# Altium PCB PCB.PcbDoc (part 2 of 2)
Units mm, origin at the board's own origin, x right, y up, seen from the top; angles counter-clockwise.
Board outline 200 x 150 mm, 2 copper layers (Top Layer, Bottom Layer); 72 components, 46 nets, 281 pads, 35 vias.
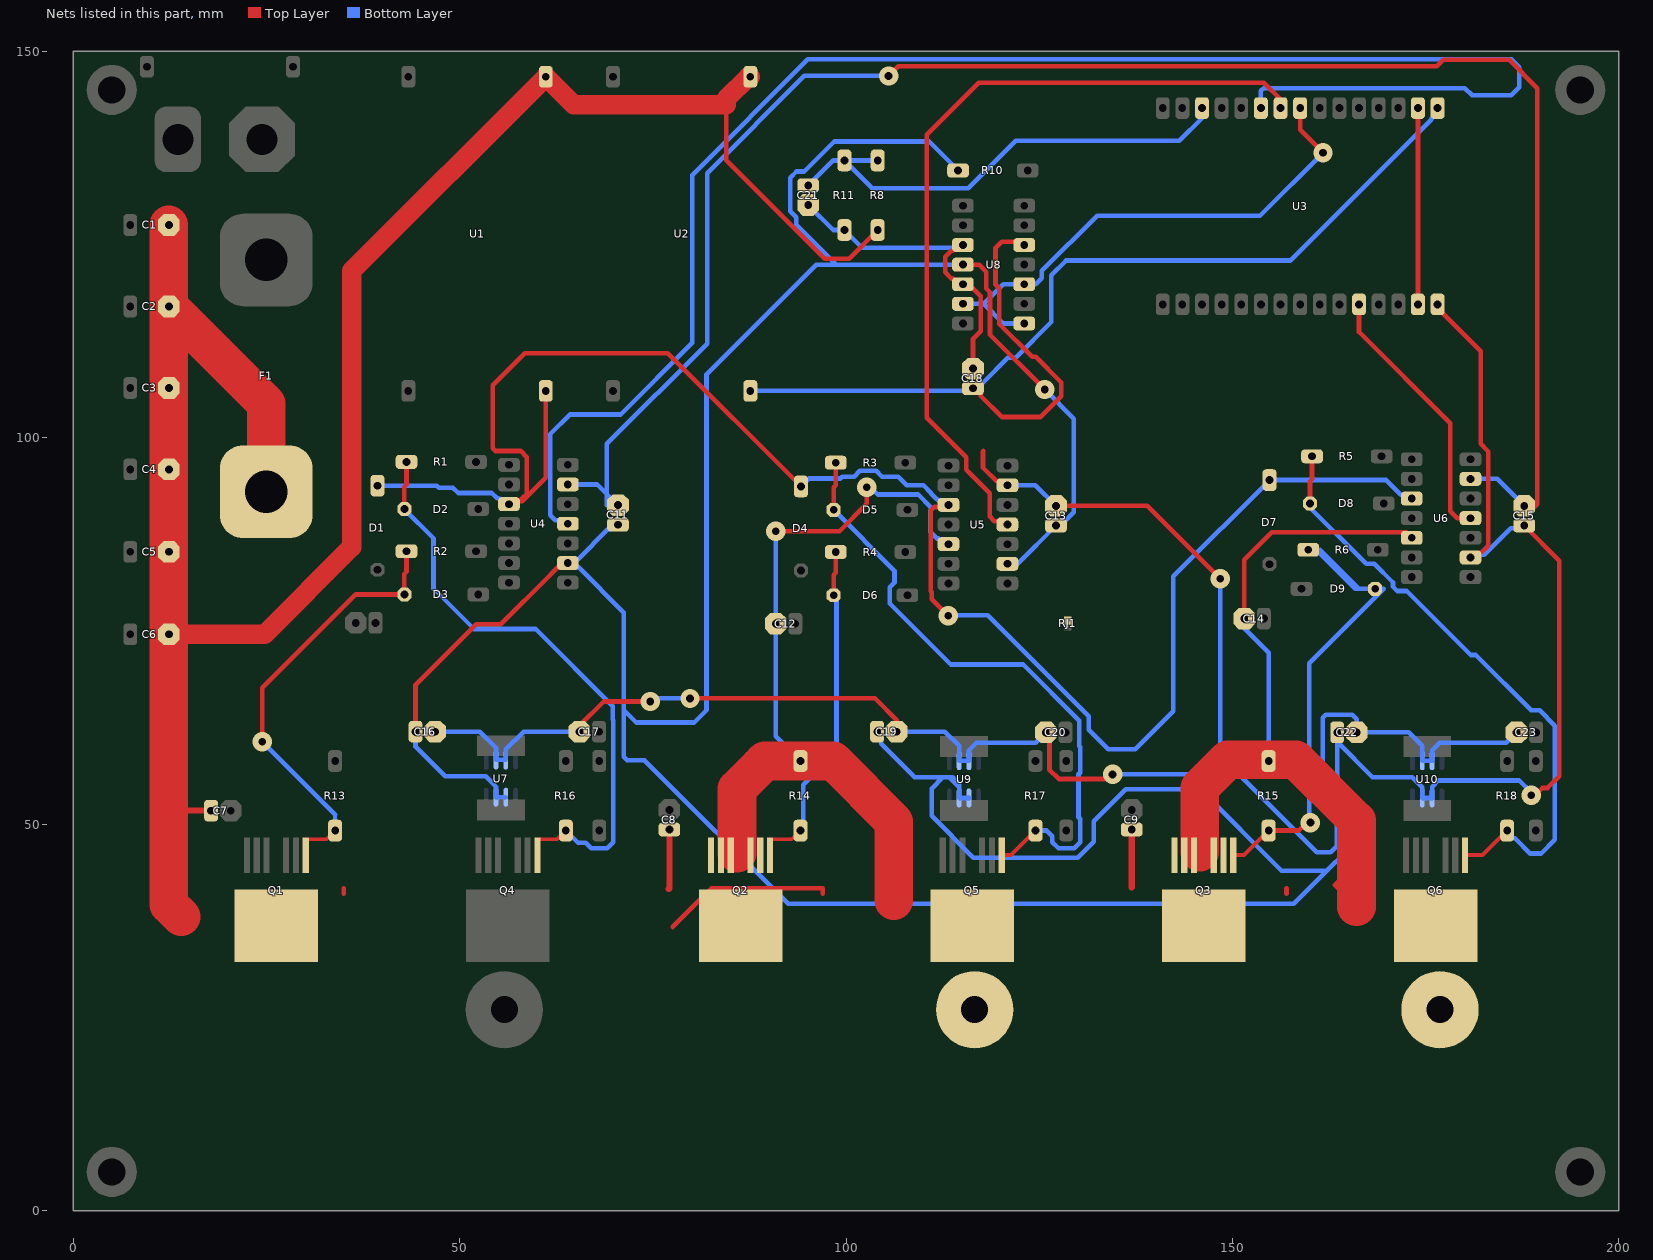
[diagram p2: the nets of this part, all layers, seen from the top]

## Via types
v1: diameter 2.5, hole 1, Top Layer to Bottom Layer, 35 vias

## Nets (pads, with @x,y where several pads share a name; then routed paths per layer and width w, separated by ;. In a path a pad name is that pad's centre, name@x,y a point inside that pad or via, vN(x,y) a via of type N, cw(c..) or ccw(c..) an arc to the next point about the centre after c; other vN are vias at no path point) (continued)
"Phase A High": D3.1 Q1.1 R2.2 R13.1 | length 57.7
  Top Layer w0.5: Q1.1@30.099,46.001 30.099,47.893 30.249,48.043 32.768,48.043 R13.1@33.9,49.175
  Top Layer w0.6: v1(24.475,60.65) 24.475,67.65 36.549,79.724 D3.1@42.863,79.724 42.863,82.372 43.133,82.642 R2.2@43.133,85.312
  Bottom Layer w0.5: R13.1@33.9,49.175 33.9,51.225
  Bottom Layer w0.6: v1(24.475,60.65) 33.9,51.225
"Phase A Low": D2.1 Q4.1 R1.2 R16.1 | length 78.7
  Top Layer w0.5: Q4.1@60.071,46.001 60.071,47.893 60.221,48.043 62.622,48.043 R16.1@63.754,49.175
  Top Layer w0.6: D2.1@42.863,90.773 42.863,93.675 43.133,93.945 R1.2@43.133,96.869
  Bottom Layer w0.6: D2.1@42.863,90.773 46.63,87.006 46.63,80.491 51.866,75.254 59.854,75.254 69.825,65.283 69.825,63.504 69.875,63.454 69.875,47.666 69.084,46.875 67.066,46.875 66.341,47.6 65.329,47.6 R16.1@63.754,49.175
"Phase B": C12.1 pad.CB Q2.2 Q2.3 Q2.5 Q2.6 Q2.7 Q5.8 R14.2 U5.5 | length 120.1
  Top Layer w0.6: v1(90.907,87.909) 99.162,87.909 102.692,91.44 v1(102.692,93.575)
  Top Layer w5: 85.9,46.225 85.9,54.575 88.812,57.488 89.5,58.175 R14.2@94.107,58.175 98.325,58.175 106.175,50.325 106.175,40.125
  Bottom Layer w0.6: C12.1@90.905,75.941 90.905,61.377 90.907,61.375 ; v1(90.907,87.909) 90.907,61.375 ; R14.2@94.107,58.175 90.907,61.375 ; v1(102.692,93.575) 103.206,93.575 104.131,92.65 109.331,92.65 110.95,91.031 110.95,87.776 111.758,86.968 111.946,86.968 112.686,86.228 U5.5@113.267,86.228
"Phase B High": D6.1 Q2.1 R4.2 R14.1 | length 44.6
  Top Layer w0.5: Q2.1@90.17,46.001 90.17,47.901 90.32,48.051 92.983,48.051 R14.1@94.107,49.175
  Top Layer w0.6: D6.1@98.405,79.624 98.405,82.271 98.675,82.541 R4.2@98.675,85.212
  Bottom Layer w0.6: R14.1@94.107,49.175 94.477,49.545 94.477,55.102 98.775,59.4 98.775,78.997 98.405,79.367 D6.1@98.405,79.624
"Phase B Low": D5.1 Q5.1 R3.2 R17.1 | length 81.8
  Top Layer w0.5: Q5.1@120.142,46.001 121.351,46.001 R17.1@124.525,49.175
  Top Layer w0.6: D5.1@98.405,90.673 98.405,93.574 98.675,93.844 R3.2@98.675,96.769
  Bottom Layer w0.6: D5.1@98.405,90.673 106.27,82.808 106.27,81.258 105.645,80.633 105.645,78.555 113.541,70.659 122.941,70.659 130.195,63.405 130.195,60.088 130.3,59.983 130.3,56.666 130.075,56.441 130.075,50.909 130.3,50.684 130.3,47.666 129.509,46.875 127.491,46.875 126.7,47.666 126.7,48.425 125.95,49.175 R17.1@124.525,49.175
"Phase C": C14.1 pad.CC Q3.2 Q3.3 Q3.5 Q3.6 Q3.7 Q6.8 R15.2 U6.5 | length 121.2
  Top Layer w0.6: C14.1@151.53,76.6 151.53,84.195 155.092,87.757 172.48,87.757 U6.5@173.184,87.053 ; R15.2@154.686,58.175 156.17,58.175 164.96,49.385 164.96,43.843 163.246,42.129 166.05,39.325 166.125,39.25
  Top Layer w5: 145.775,46.375 145.775,54.725 149.375,58.325 158.2,58.325 166.05,50.475 166.05,39.325
  Bottom Layer w0.6: C14.1@151.53,76.6 151.53,75.345 154.686,72.189 R15.2@154.686,58.175
"Phase C High": D9.1 Q3.1 R6.2 R15.1 | length 68.4
  Top Layer w0.5: Q3.1@150.114,46.001 151.512,46.001 R15.1@154.686,49.175
  Top Layer w0.6: R15.1@154.686,49.175 158.545,49.175 159.573,50.203 v1(160.087,50.203)
  Bottom Layer w0.6: R6.2@159.8,85.5 R6.2@160.837,85.5 ; v1(160.087,50.203) 159.946,50.345 159.946,70.825 169.57,80.449 165.888,80.449 R6.2@160.837,85.5 ; R6.2@160.3,86.037 R6.2@160.837,85.5 ; D9.1@168.47,80.45 166.37,80.45 161.32,85.5 R6.2@160.837,85.5
"Phase C Low": D8.1 Q6.1 R5.2 R18.1 | length 80.4
  Top Layer w0.5: Q6.1@180.086,46.001 182.373,46.001 R18.1@185.547,49.175
  Top Layer w0.6: D8.1@160.03,91.498 160.03,94.386 160.3,94.656 R5.2@160.3,97.594
  Bottom Layer w0.6: D8.1@160.03,91.498 160.03,90.961 167.291,83.7 168.343,83.7 170.77,81.273 170.77,80.73 171.327,80.173 172.526,80.173 180.814,71.885 181.477,71.885 188.637,64.725 189.754,64.725 191.725,62.754 191.725,48 189.925,46.2 188.522,46.2 186.554,48.168 186.136,48.168 185.547,48.756 R18.1@185.547,49.175
SGND: C11.1 C13.1 C15.1 C16.1 C17.1 C18.1 C19.1 C20.1 C21.1 C22.1 C23.1 R11.2 RJ1.2 U3.2 U3.29 U4.13 U5.13 U6.13 U7.2 U7.3 U8.10 U8.12 U9.2 U9.3 U10.2 U10.3 | length 564.6
  Top Layer w0.6: C17.1@65.505,61.975 65.505,62.744 68.636,65.875 v1(74.675,65.875) ; v1(79.807,66.269) 103.756,66.269 106.57,63.455 C19.1@106.57,61.975 ; v1(105.512,146.812) 106.756,148.057 176.454,148.057 177.292,148.895 185.801,148.895 189.459,145.237 189.459,91.41 188.49,90.441 C15.1@187.75,91.181 ; U8.12@115.127,124.94 114.546,124.94 113.806,124.2 113.618,124.2 112.827,123.409 112.827,121.391 113.618,120.6 113.806,120.6 114.546,119.86 U8.10@115.127,119.86 115.635,119.353 116.404,119.353 117.428,118.329 117.428,113.771 116.425,112.768 C18.1@116.425,108.945 ; 117.775,98.3 117.73,98.255 117.73,96.12 119.495,94.355 120.38,94.355 U5.13@120.887,93.848 ; C20.1@125.855,61.875 126.325,61.405 126.325,57.041 127.516,55.85 133.39,55.85 133.979,56.439 v1(134.493,56.439) ; C13.1@127.944,91.181 C13.1@127.175,91.181 138.994,91.181 v1(148.412,81.763) ; U3.2@174,117.25 U3.29@174,142.65
  Bottom Layer w0.6: C16.1@46.845,61.975 52.602,61.975 54.711,59.866 54.711,58.318 U7.2@54.715,58.314 U7.3@55.985,58.314 55.989,58.318 55.989,59.684 58.28,61.975 C17.1@65.505,61.975 ; U4.13@64.016,93.948 67.826,93.948 C11.1@70.493,91.281 69.05,91.281 69.05,99.2 82.024,112.174 82.024,134.226 94.61,146.812 v1(105.512,146.812) ; v1(74.675,65.875) 75.069,66.269 v1(79.807,66.269) ; C21.1@95.1,130.105 98.33,126.875 R11.2@99.795,126.875 102.07,124.6 103.066,124.6 103.091,124.575 105.109,124.575 105.134,124.6 114.787,124.6 U8.12@115.127,124.94 ; C19.1@106.57,61.975 112.789,61.975 114.64,60.124 U9.2@114.64,58.214 U9.3@115.91,58.214 115.914,58.218 115.914,59.584 116.885,60.555 124.535,60.555 C20.1@125.855,61.875 ; U5.13@120.887,93.848 124.508,93.848 C13.1@127.175,91.181 ; v1(134.493,56.439) 150.292,56.439 148.412,58.318 148.412,58.838 ; v1(148.412,81.763) 148.412,58.838 ; U6.13@180.804,94.673 184.258,94.673 C15.1@187.75,91.181 ; C23.1@186.755,61.875 185.435,60.555 176.81,60.555 175.839,59.584 175.839,58.218 U10.3@175.835,58.214 U10.2@174.565,58.214 174.565,60.124 172.814,61.875 C22.1@166.095,61.875 166.095,63.555 165.475,64.175 164.564,64.175 162.075,64.175 161.688,63.788 161.688,51.968 163.491,50.165 163.491,47.133 162.712,46.355 160.895,46.355 148.412,58.838
"Shutdown A": U3.21 U4.11 | length 211.1
  Bottom Layer w0.6: U4.11@64.016,88.868 63.56,89.324 62.363,89.324 61.716,89.971 61.716,97.497 61.75,97.531 61.75,100.485 64.262,102.997 70.822,102.997 80.086,112.261 80.086,133.985 95.074,148.973 186.104,148.973 187.122,147.955 187.122,145.364 186.055,144.297 181,144.297 180.073,145.225 154.031,145.225 153.68,144.874 U3.21@153.68,142.65
"Shutdown B": U3.22 U5.11 | length 106.1
  Top Layer w0.6: U5.11@120.887,88.768 120.46,89.195 119.205,89.195 118.587,89.813 118.587,92.317 118.599,92.329 118.599,92.826 115.567,95.859 115.567,97.471 110.427,102.61 110.427,139.206 117.17,145.948 154.076,145.948 156.22,143.805 U3.22@156.22,142.65
"Shutdown C": U3.5 U6.11 | length 34.6
  Top Layer w0.6: U3.5@166.38,117.25 166.38,113.68 178.181,101.879 178.181,90.482 179.07,89.593 U6.11@180.804,89.593
"Vcc 1 (+)": D1.2 D4.2 D7.2 U1.4 U4.3 U5.3 U6.3 | length 237.3
  Top Layer w0.6: U4.3@56.396,91.408 U4.3@56.977,91.408 ; U1.4@61.155,106.06 61.155,94.83 58.771,92.446 58.771,92.405 58.696,92.405 ; D4.2@94.175,93.698 76.926,110.947 58.42,110.947 54.275,106.802 54.275,98.639 54.626,98.288 57.905,98.288 58.696,97.497 58.696,94.068 58.696,92.405 ; v1(113.225,76.975) 111.073,79.127 111.073,80.033 110.967,80.139 110.967,90.585 111.424,91.042 113.001,91.042 U5.3@113.267,91.308 ; U4.3@56.977,91.408 57.353,91.408 U4.3@57.739,91.794 ; U4.3@56.977,91.408 57.363,91.794 U4.3@57.739,91.794 ; U4.3@57.739,91.794 58.35,92.405 58.696,92.405 ; U4.3@57.739,91.794 58.119,91.794 58.696,92.371 58.696,92.405
  Bottom Layer w0.6: D1.2@39.378,93.798 47.049,93.798 47.322,93.525 49.147,93.525 49.822,92.85 54.185,92.85 54.887,92.148 55.075,92.148 55.815,91.408 U4.3@56.396,91.408 ; D4.2@94.175,93.698 95.194,94.717 99.274,94.717 99.527,94.969 101.046,94.969 101.802,95.725 103.9,95.725 104.656,94.969 106.754,94.969 107.873,93.85 110.025,93.85 110.967,92.908 110.967,92.839 111.758,92.048 111.816,92.048 111.956,91.908 112.086,91.908 112.686,91.308 U5.3@113.267,91.308 ; v1(113.225,76.975) 113.275,77.025 118.327,77.025 131.395,63.956 131.395,62.229 133.934,59.69 137.414,59.69 142.342,64.618 142.342,82.065 D7.2@154.8,94.523 169.902,94.523 171.785,92.64 172.677,92.64 U6.3@173.184,92.133
"Vcc 2 (+)": C18.2 U2.4 U3.30 U8.3 | length 150
  Top Layer w0.6: C18.2@116.425,106.405 116.844,106.405 117.432,105.816 117.432,105.398 120.141,102.689 125.18,102.689 127.85,105.359 127.85,107.141 124.531,110.46 124.079,110.46 119.827,114.711 119.827,119.323 119.349,119.802 119.349,124.566 120.148,125.365 122.643,125.365 U8.3@123.068,124.94
  Bottom Layer w0.6: U2.4@87.625,106.06 116.627,106.06 116.627,106.203 C18.2@116.425,106.405 117.006,106.405 117.746,107.145 117.748,107.145 120.944,110.342 121.938,110.342 126.568,114.971 126.568,121.024 128.468,122.924 157.498,122.924 175.74,141.166 175.74,141.269 176.54,142.069 U3.30@176.54,142.65
"Vcc Supply (+)": C1.1 C2.1 C3.1 C4.1 C5.1 C6.1 C7.2 C8.2 C9.2 F1.2 Q1.8 Q2.8 Q3.8 R8.1 U1.1 U2.1 | length 333.1
  Top Layer w0.6: 35,41 35,41.697 ; Q2.8@82.04,41.171 77.572,36.703 82.601,41.732 97,41.732 97,41 ; 84.485,143.56 84.485,143.1 84.485,135.92 97.23,123.175 100.4,123.175 R8.1@104.1,126.875 ; 157,41 157,41.697
  Top Layer w0.8: 12.394,51.9 12.544,51.75 C7.2@17.855,51.75 ; 77.075,41.6 77.15,41.675 C8.2@77.15,49.305 ; 136.95,41.825 136.975,41.85 C9.2@136.975,49.305
  Top Layer w2.54: C6.1@12.394,74.565 24.765,74.565 36.033,85.833 36.033,121.578 U1.1@61.155,146.7 64.755,143.1 84.485,143.1 ; 84.485,143.56 84.485,143.8 87.385,146.7 U2.1@87.625,146.7
  Top Layer w5: C1.1@12.394,127.524 C2.1@12.394,116.983 ; 14,38 12.394,39.606 12.394,51.9 C6.1@12.394,74.565 C5.1@12.394,85.233 C4.1@12.394,95.901 C3.1@12.394,106.442 C2.1@12.394,116.983 ; F1.2@25,93 25,104.377 C2.1@12.394,116.983
"Vcc Supply Sense": C21.2 R8.2 R11.1 U3.18 | length 63.2
  Bottom Layer w0.6: C21.2@95.1,132.645 98.33,135.875 R11.1@99.795,135.875 ; R8.2@104.1,135.875 R11.1@99.795,135.875 ; U3.18@146.06,142.65 146.06,141.361 143.122,138.423 121.964,138.423 115.799,132.258 103.412,132.258 R11.1@99.795,135.875
"Vdac Ref": U3.23 U8.5 U8.7 U8.9 | length 68.6
  Top Layer w0.6: U3.23@158.76,142.65 158.76,139.842 v1(161.722,136.881)
  Bottom Layer w0.6: U8.9@115.127,117.32 117.805,117.32 ; U8.7@123.068,114.78 120.345,114.78 117.805,117.32 ; v1(161.722,136.881) 153.568,128.727 132.486,128.727 125.349,121.59 125.349,120.65 124.559,119.86 U8.5@123.068,119.86 120.345,119.86 117.805,117.32
"Vmicro Ref": C11.2 C13.2 C15.2 C16.2 C19.2 C22.2 R10.2 U3.1 U4.9 U5.9 U6.9 U7.6 U7.7 U8.11 U9.6 U9.7 U10.6 U10.7 | length 596.5
  Top Layer w0.6: C16.2@44.305,61.975 44.305,68.013 52.156,75.865 55.34,75.865 61.716,82.241 61.716,82.257 62.507,83.048 62.523,83.048 62.756,83.281 63.509,83.281 U4.9@64.016,83.788 ; U8.11@115.127,122.4 117.225,122.4 118.149,121.476 118.149,119.305 118.627,118.826 118.627,113.348 125.7,106.275 v1(125.7,106.25) ; U3.1@176.54,117.25 176.54,116.75 182.125,111.165 182.125,99.201 183.104,98.222 183.104,86.044 182.081,85.02 181.893,85.02 181.385,84.513 U6.9@180.804,84.513 ; C15.2@187.75,88.641 192.295,84.096 192.295,56.214 190.756,54.675 190.116,54.675 189.166,53.725 v1(188.651,53.725)
  Bottom Layer w0.6: C16.2@44.305,61.975 44.305,60.02 48.146,56.179 53.389,56.179 54.711,54.857 54.711,53.491 U7.7@54.715,53.486 U7.6@55.985,53.486 ; C11.2@70.493,88.741 69.912,88.741 69.312,88.141 69.191,88.141 65.345,84.295 64.523,84.295 U4.9@64.016,83.788 64.523,83.281 65.344,83.281 71.247,77.378 71.247,64.77 ; C19.2@104.03,61.975 104.537,61.468 104.537,60.413 108.871,56.079 112.522,56.079 113.314,56.079 113.335,56.058 ; R10.2@114.5,134.575 110.75,138.325 98.472,138.325 94.592,134.445 93.591,134.445 92.8,133.654 92.8,129.282 93.548,128.534 93.548,127.584 98.732,122.4 ; U8.11@115.127,122.4 98.732,122.4 ; U9.6@115.91,53.386 U9.7@114.64,53.386 ; U5.9@120.887,83.688 122.222,83.688 C13.2@127.175,88.641 127.756,88.641 128.496,89.381 128.498,89.381 129.475,90.358 129.475,102.475 v1(125.7,106.25) ; C22.2@163.555,61.875 C22.2@163.555,60.645 ; U6.9@180.804,84.513 181.154,84.863 182.563,84.863 185.991,88.291 187.4,88.291 C15.2@187.75,88.641 ; v1(188.651,53.725) 188.651,54.113 187.113,55.651 176.657,55.651 175.835,54.829 U10.6@175.835,53.386 U10.7@174.565,53.386 174.561,53.391 174.561,54.757 173.239,56.079 168.121,56.079 C22.2@163.555,60.645 ; 71.247,64.77 72.864,63.153 80.34,63.153 81.957,64.77 81.957,108.22 96.136,122.4 98.732,122.4 ; 71.247,64.77 71.247,58.707 71.67,58.284 73.923,58.284 92.504,39.703 157.948,39.703 162.222,43.976 ; 113.335,56.058 114.636,54.757 114.636,53.391 U9.7@114.64,53.386 ; 113.335,56.058 113.827,56.058 114.64,55.245 U9.7@114.64,53.386 ; 113.335,56.058 112.522,56.058 111.074,54.61 111.074,51.085 116.484,45.675 130.006,45.675 132.051,47.719 132.051,50.376 136.183,54.508 145.817,54.508 156.349,43.976 162.222,43.976 ; 162.222,43.976 164.691,46.445 164.691,52.546 163.555,53.682 C22.2@163.555,60.645
pads on no net: J1.S1 J1.S2 U3.3 U3.4 U3.6 U3.7 U3.8 U3.12 U3.13 U3.16 U3.26 U3.27 U3.28 U4.4 U4.8 U4.14 U5.4 U5.8 U5.14 U6.4 U6.8 U6.14 U7.4 U8.13 U9.4 U10.4

## Polygon pours and split planes (outlines as drawn)
PGND on Top Layer "PGND Top" (solid, remove dead copper, pour order 37): 92.2,149.988 92.2,102.175 34.85,102.175 34.85,75.138 200,75.138 200,0 199.987,0.013 0,0.013 0,150.013
SGND on Top Layer "SGND Top" (solid, remove dead copper, pour order 40): 92.2,149.988 92.213,149.975 199.975,149.975 199.975,75.163 199.988,75.15 34.85,75.15 34.85,102.175 34.874,102.151 92.2,102.151
"Phase C" on Top Layer "Heatsink Q6" (solid, remove dead copper, pour order 30): 163.542,42 188.542,42 188.542,17 163.542,17 163.65,16.892 163.65,16.746
"Vcc Supply (+)" on Top Layer "Heatsink Q3" (solid, remove dead copper, pour order 5): 133.646,42 158.646,42 158.646,5 133.804,5
"Phase B" on Top Layer "Heatsink Q2" (solid, remove dead copper, pour order 4): 103.622,42 128.622,42 128.622,17 103.622,17 103.73,16.892 103.73,16.746
"Vcc Supply (+)" on Top Layer "Heatsink Q5" (solid, remove dead copper, pour order 3): 73.479,42 98.479,42 98.479,5 73.637,5
"Phase A" on Top Layer "Heatsink Q4" (solid, remove dead copper, pour order 2): 43.575,42 68.575,42 68.575,16.746 43.683,16.746
"Vcc Supply (+)" on Top Layer "Heatsink Q1" (solid, remove dead copper, pour order 1): 9.919,42 39,42 39,5 10.077,5
PGND on Bottom Layer "PGND Bottom" (solid, remove dead copper, pour order 35): 92.2,150 92.2,102.175 34.85,102.175 34.85,75.15 200,75.15 200,0.012 199.987,0.025 0,0.025 0,150.025
SGND on Bottom Layer "SGND Bottom" (solid, remove dead copper, pour order 44): 92.187,150.013 92.2,150 199.962,150 199.962,75.188 199.975,75.175 34.837,75.175 34.837,102.2 34.86,102.176 92.187,102.176

## Other copper
Top Layer:
  region net PGND: 169.55,68.575 181.65,68.85 178.3,58.775 172.1,58.775
  region net PGND: 109.675,68.475 121.675,68.475 118.425,58.675 112.225,58.675
  region net PGND: 49.775,69.05 61.7,68.6 58.45,58.8 52.25,58.8
  region net "Vcc Supply (+)": 39,5 158.646,5 158.646,12 39,12
  region net "Isense C +": 172.1,53.025 172.1,43.7 172.062,43.662 179.187,43.662 179.187,48.238 178.3,49.125 178.3,53.05
  region net "Phase C": 142.1,48.3 149.25,48.3 149.25,43.7 142.1,43.7
  region net "Phase B": 82.15,48.3 89.3,48.3 89.3,43.7 82.15,43.7
  region net "Phase A": 22.075,48.3 22.075,43.7 29.225,43.7 29.225,48.3
  region net "Isense A +": 52.05,48.3 52.05,43.7 59.2,43.7 59.2,48.3
  region net "Isense A +": 52.05,53.199 52.05,43.7 59.2,43.7 59.2,48.3 58.45,49.3 58.45,53.225
  region net "Isense B +": 112.175,53.075 112.175,43.75 112.137,43.712 119.262,43.712 119.262,48.288 118.375,49.175 118.375,53.1
  region net "Isense B +": 112.125,48.3 112.125,43.7 119.275,43.7 119.25,43.725 119.25,48.3
  region net SGND: 115.475,109.845 115.025,109.395 115.025,108.495 115.475,108.045 117.375,108.045 117.825,108.495 117.825,109.395 117.375,109.845
  region net SGND: 186.8,92.081 186.35,91.631 186.35,90.731 186.8,90.281 188.7,90.281 189.15,90.731 189.15,91.631 188.7,92.081
  region net SGND: 185.855,60.925 186.305,60.475 187.205,60.475 187.655,60.925 187.655,62.825 187.205,63.275 186.305,63.275 185.855,62.825
  region net SGND: 126.225,92.081 125.775,91.631 125.775,90.731 126.225,90.281 128.125,90.281 128.575,90.731 128.575,91.631 128.125,92.081
  region net SGND: 166.995,62.825 166.545,63.275 165.645,63.275 165.195,62.825 165.195,60.925 165.645,60.475 166.545,60.475 166.995,60.925
  region net SGND: 124.955,60.925 125.405,60.475 126.305,60.475 126.755,60.925 126.755,62.825 126.305,63.275 125.405,63.275 124.955,62.825
  region net SGND: 96.05,129.205 96.5,129.655 96.5,130.555 96.05,131.005 94.15,131.005 93.7,130.555 93.7,129.655 94.15,129.205
  region net SGND: 69.543,92.181 69.093,91.731 69.093,90.831 69.543,90.381 71.443,90.381 71.893,90.831 71.893,91.731 71.443,92.181
  region net SGND: 107.47,62.925 107.02,63.375 106.12,63.375 105.67,62.925 105.67,61.025 106.12,60.575 107.02,60.575 107.47,61.025
  region net SGND: 64.605,61.025 65.055,60.575 65.955,60.575 66.405,61.025 66.405,62.925 65.955,63.375 65.055,63.375 64.605,62.925
  region net SGND: 47.745,62.925 47.295,63.375 46.395,63.375 45.945,62.925 45.945,61.025 46.395,60.575 47.295,60.575 47.745,61.025
  region net NetF1_1: 27.45,141.35 25.95,142.85 22.95,142.85 21.45,141.35 21.45,135.85 22.95,134.35 25.95,134.35 27.45,135.85
  region net PGND: 136.025,52.745 135.575,52.295 135.575,51.395 136.025,50.945 137.925,50.945 138.375,51.395 138.375,52.295 137.925,52.745
  region net PGND: 76.2,52.745 75.75,52.295 75.75,51.395 76.2,50.945 78.1,50.945 78.55,51.395 78.55,52.295 78.1,52.745
  region net PGND: 21.295,52.7 20.845,53.15 19.945,53.15 19.495,52.7 19.495,50.8 19.945,50.35 20.845,50.35 21.295,50.8
  region net "Vcc Supply (+)": 11.494,126.574 11.944,126.124 12.844,126.124 13.294,126.574 13.294,128.474 12.844,128.924 11.944,128.924 11.494,128.474
  region net "Vcc Supply (+)": 11.494,116.033 11.944,115.583 12.844,115.583 13.294,116.033 13.294,117.933 12.844,118.383 11.944,118.383 11.494,117.933
  region net "Vcc Supply (+)": 11.494,105.492 11.944,105.042 12.844,105.042 13.294,105.492 13.294,107.392 12.844,107.842 11.944,107.842 11.494,107.392
  region net "Vcc Supply (+)": 11.494,84.283 11.944,83.833 12.844,83.833 13.294,84.283 13.294,86.183 12.844,86.633 11.944,86.633 11.494,86.183
  region net "Vcc Supply (+)": 11.494,73.615 11.944,73.165 12.844,73.165 13.294,73.615 13.294,75.515 12.844,75.965 11.944,75.965 11.494,75.515
  region net "Vcc Supply (+)": 11.494,94.951 11.944,94.501 12.844,94.501 13.294,94.951 13.294,96.851 12.844,97.301 11.944,97.301 11.494,96.851
  region net "Phase A": 35.684,75.091 36.134,74.641 37.034,74.641 37.484,75.091 37.484,76.991 37.034,77.441 36.134,77.441 35.684,76.991
  region net "Phase B": 90.005,74.991 90.455,74.541 91.355,74.541 91.805,74.991 91.805,76.891 91.355,77.341 90.455,77.341 90.005,76.891
  region net NetC12_2: 95.075,81.872 94.625,81.422 93.725,81.422 93.275,81.872 93.275,83.772 93.725,84.222 94.625,84.222 95.075,83.772
  region net "Phase C": 150.63,75.65 151.08,75.2 151.98,75.2 152.43,75.65 152.43,77.55 151.98,78 151.08,78 150.63,77.55
  region net NetC14_2: 155.7,82.697 155.25,82.247 154.35,82.247 153.9,82.697 153.9,84.597 154.35,85.047 155.25,85.047 155.7,84.597
  region net "Phase C High": 169.42,81.35 169.87,80.9 169.87,80 169.42,79.55 167.52,79.55 167.07,80 167.07,80.9 167.52,81.35
  region net NetC10_2: 40.278,81.972 39.828,81.522 38.928,81.522 38.478,81.972 38.478,83.872 38.928,84.322 39.828,84.322 40.278,83.872
  region net "Phase A Low": 41.913,89.873 41.463,90.323 41.463,91.223 41.913,91.673 43.813,91.673 44.263,91.223 44.263,90.323 43.813,89.873
  region net "Phase A High": 41.913,78.824 41.463,79.274 41.463,80.174 41.913,80.624 43.813,80.624 44.263,80.174 44.263,79.274 43.813,78.824
  region net "Phase B Low": 97.455,89.773 97.005,90.223 97.005,91.123 97.455,91.573 99.355,91.573 99.805,91.123 99.805,90.223 99.355,89.773
  region net "Phase B High": 97.455,78.724 97.005,79.174 97.005,80.074 97.455,80.524 99.355,80.524 99.805,80.074 99.805,79.174 99.355,78.724
  region net "Phase C Low": 159.08,90.598 158.63,91.048 158.63,91.948 159.08,92.398 160.98,92.398 161.43,91.948 161.43,91.048 160.98,90.598
Bottom Layer:
  region net SGND: 115.475,109.845 115.025,109.395 115.025,108.495 115.475,108.045 117.375,108.045 117.825,108.495 117.825,109.395 117.375,109.845
  region net SGND: 186.8,92.081 186.35,91.631 186.35,90.731 186.8,90.281 188.7,90.281 189.15,90.731 189.15,91.631 188.7,92.081
  region net SGND: 185.855,60.925 186.305,60.475 187.205,60.475 187.655,60.925 187.655,62.825 187.205,63.275 186.305,63.275 185.855,62.825
  region net SGND: 126.225,92.081 125.775,91.631 125.775,90.731 126.225,90.281 128.125,90.281 128.575,90.731 128.575,91.631 128.125,92.081
  region net SGND: 166.995,62.825 166.545,63.275 165.645,63.275 165.195,62.825 165.195,60.925 165.645,60.475 166.545,60.475 166.995,60.925
  region net SGND: 124.955,60.925 125.405,60.475 126.305,60.475 126.755,60.925 126.755,62.825 126.305,63.275 125.405,63.275 124.955,62.825
  region net SGND: 96.05,129.205 96.5,129.655 96.5,130.555 96.05,131.005 94.15,131.005 93.7,130.555 93.7,129.655 94.15,129.205
  region net SGND: 69.543,92.181 69.093,91.731 69.093,90.831 69.543,90.381 71.443,90.381 71.893,90.831 71.893,91.731 71.443,92.181
  region net SGND: 107.47,62.925 107.02,63.375 106.12,63.375 105.67,62.925 105.67,61.025 106.12,60.575 107.02,60.575 107.47,61.025
  region net SGND: 64.605,61.025 65.055,60.575 65.955,60.575 66.405,61.025 66.405,62.925 65.955,63.375 65.055,63.375 64.605,62.925
  region net SGND: 47.745,62.925 47.295,63.375 46.395,63.375 45.945,62.925 45.945,61.025 46.395,60.575 47.295,60.575 47.745,61.025
  region net NetF1_1: 27.45,141.35 25.95,142.85 22.95,142.85 21.45,141.35 21.45,135.85 22.95,134.35 25.95,134.35 27.45,135.85
  region net PGND: 136.025,52.745 135.575,52.295 135.575,51.395 136.025,50.945 137.925,50.945 138.375,51.395 138.375,52.295 137.925,52.745
  region net PGND: 76.2,52.745 75.75,52.295 75.75,51.395 76.2,50.945 78.1,50.945 78.55,51.395 78.55,52.295 78.1,52.745
  region net PGND: 21.295,52.7 20.845,53.15 19.945,53.15 19.495,52.7 19.495,50.8 19.945,50.35 20.845,50.35 21.295,50.8
  region net "Vcc Supply (+)": 11.494,126.574 11.944,126.124 12.844,126.124 13.294,126.574 13.294,128.474 12.844,128.924 11.944,128.924 11.494,128.474
  region net "Vcc Supply (+)": 11.494,116.033 11.944,115.583 12.844,115.583 13.294,116.033 13.294,117.933 12.844,118.383 11.944,118.383 11.494,117.933
  region net "Vcc Supply (+)": 11.494,105.492 11.944,105.042 12.844,105.042 13.294,105.492 13.294,107.392 12.844,107.842 11.944,107.842 11.494,107.392
  region net "Vcc Supply (+)": 11.494,84.283 11.944,83.833 12.844,83.833 13.294,84.283 13.294,86.183 12.844,86.633 11.944,86.633 11.494,86.183
  region net "Vcc Supply (+)": 11.494,73.615 11.944,73.165 12.844,73.165 13.294,73.615 13.294,75.515 12.844,75.965 11.944,75.965 11.494,75.515
  region net "Vcc Supply (+)": 11.494,94.951 11.944,94.501 12.844,94.501 13.294,94.951 13.294,96.851 12.844,97.301 11.944,97.301 11.494,96.851
  region net "Phase A": 35.684,75.091 36.134,74.641 37.034,74.641 37.484,75.091 37.484,76.991 37.034,77.441 36.134,77.441 35.684,76.991
  region net "Phase B": 90.005,74.991 90.455,74.541 91.355,74.541 91.805,74.991 91.805,76.891 91.355,77.341 90.455,77.341 90.005,76.891
  region net NetC12_2: 95.075,81.872 94.625,81.422 93.725,81.422 93.275,81.872 93.275,83.772 93.725,84.222 94.625,84.222 95.075,83.772
  region net "Phase C": 150.63,75.65 151.08,75.2 151.98,75.2 152.43,75.65 152.43,77.55 151.98,78 151.08,78 150.63,77.55
  region net NetC14_2: 155.7,82.697 155.25,82.247 154.35,82.247 153.9,82.697 153.9,84.597 154.35,85.047 155.25,85.047 155.7,84.597
  region net "Phase C High": 169.42,81.35 169.87,80.9 169.87,80 169.42,79.55 167.52,79.55 167.07,80 167.07,80.9 167.52,81.35
  region net NetC10_2: 40.278,81.972 39.828,81.522 38.928,81.522 38.478,81.972 38.478,83.872 38.928,84.322 39.828,84.322 40.278,83.872
  region net "Phase A Low": 41.913,89.873 41.463,90.323 41.463,91.223 41.913,91.673 43.813,91.673 44.263,91.223 44.263,90.323 43.813,89.873
  region net "Phase A High": 41.913,78.824 41.463,79.274 41.463,80.174 41.913,80.624 43.813,80.624 44.263,80.174 44.263,79.274 43.813,78.824
  region net "Phase B Low": 97.455,89.773 97.005,90.223 97.005,91.123 97.455,91.573 99.355,91.573 99.805,91.123 99.805,90.223 99.355,89.773
  region net "Phase B High": 97.455,78.724 97.005,79.174 97.005,80.074 97.455,80.524 99.355,80.524 99.805,80.074 99.805,79.174 99.355,78.724
  region net "Phase C Low": 159.08,90.598 158.63,91.048 158.63,91.948 159.08,92.398 160.98,92.398 161.43,91.948 161.43,91.048 160.98,90.598

## Silkscreen, mask and mechanical layers (free items; w line width, h text height)
Mechanical 1:
  lines w1: 0.152,0 200.153,0 200.153,150.001 0.152,150.001 0.152,0

## Text inside footprints (layer, text, board x,y; h text height)
C1: Top Overlay "+" at 12.094,128.924 h2
C2: Top Overlay "+" at 12.094,118.383 h2
C3: Top Overlay "+" at 12.094,107.842 h2
C4: Top Overlay "+" at 12.094,97.301 h2
C5: Top Overlay "+" at 12.094,86.633 h2
C6: Top Overlay "+" at 12.094,75.965 h2
U1: Mechanical 6 "REF**" at 51.985,125.804 h1 r270
U2: Mechanical 6 "REF**" at 78.455,125.804 h1 r270